# EAGLE board ProtoBlue_Base (EAGLE 9.2.0)
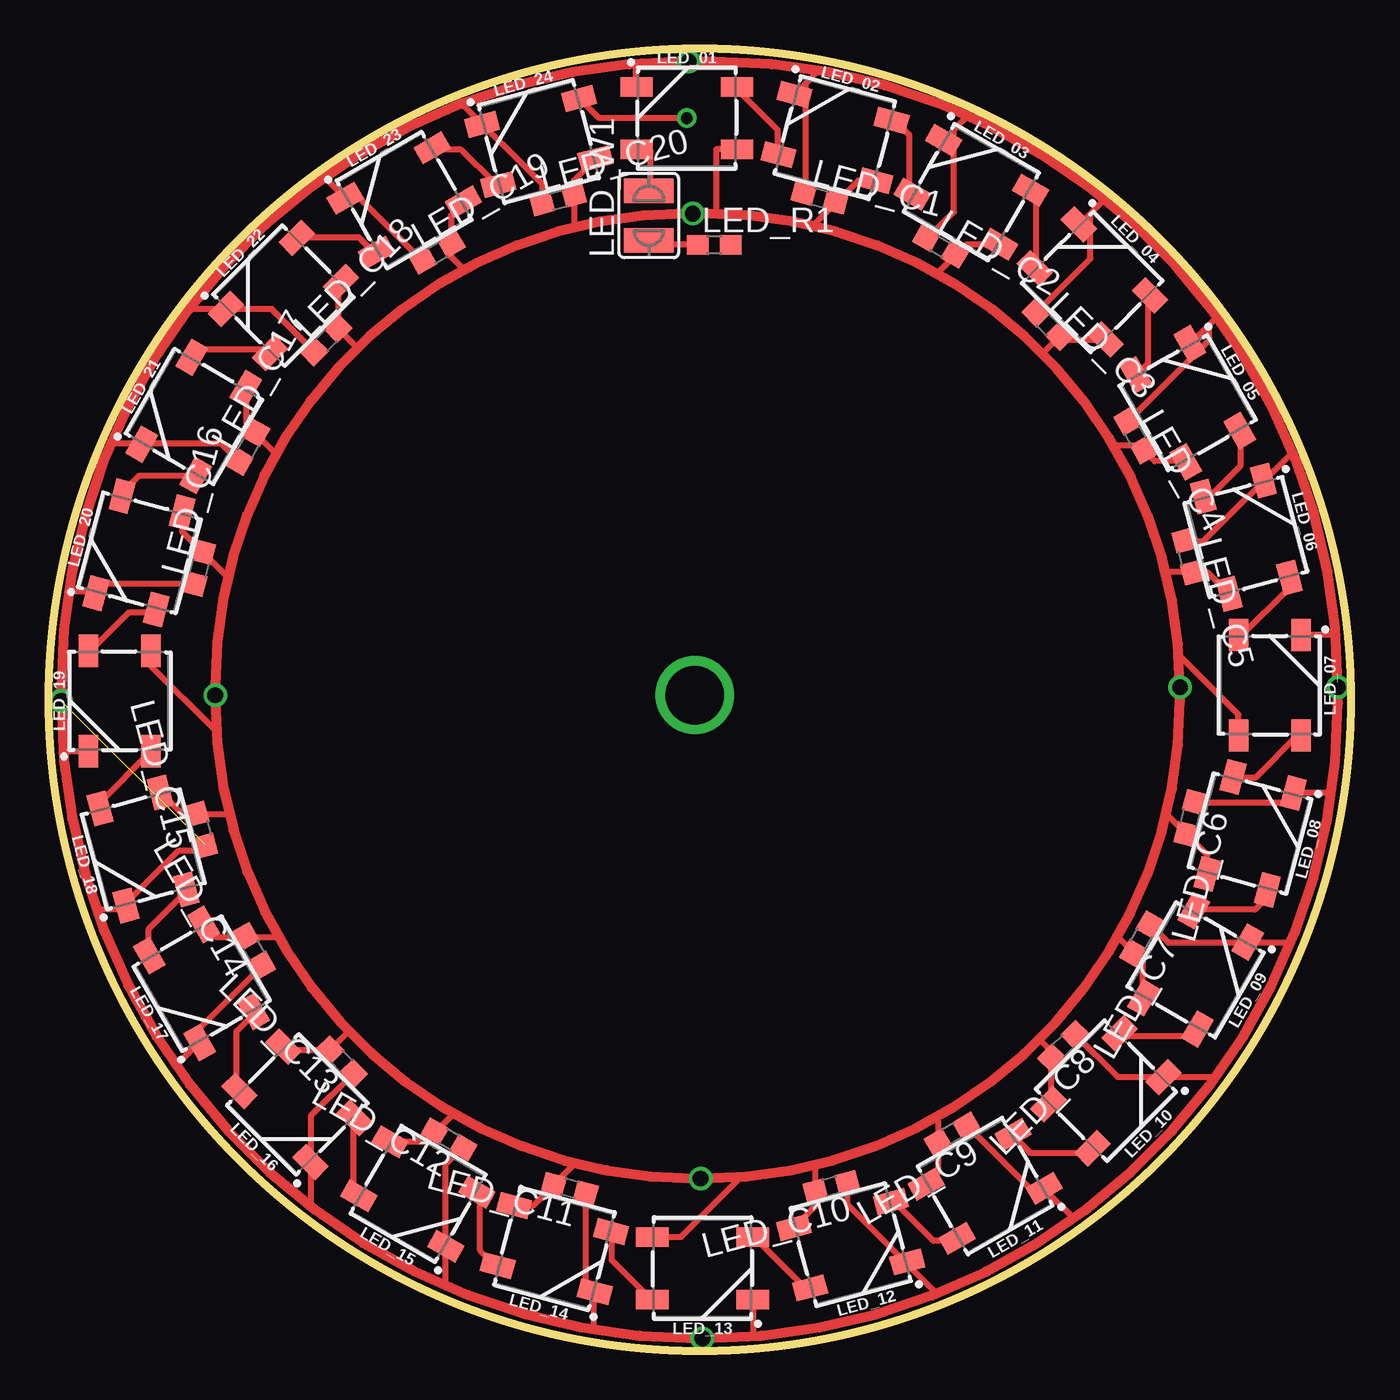
[diagram p0: board, top side]
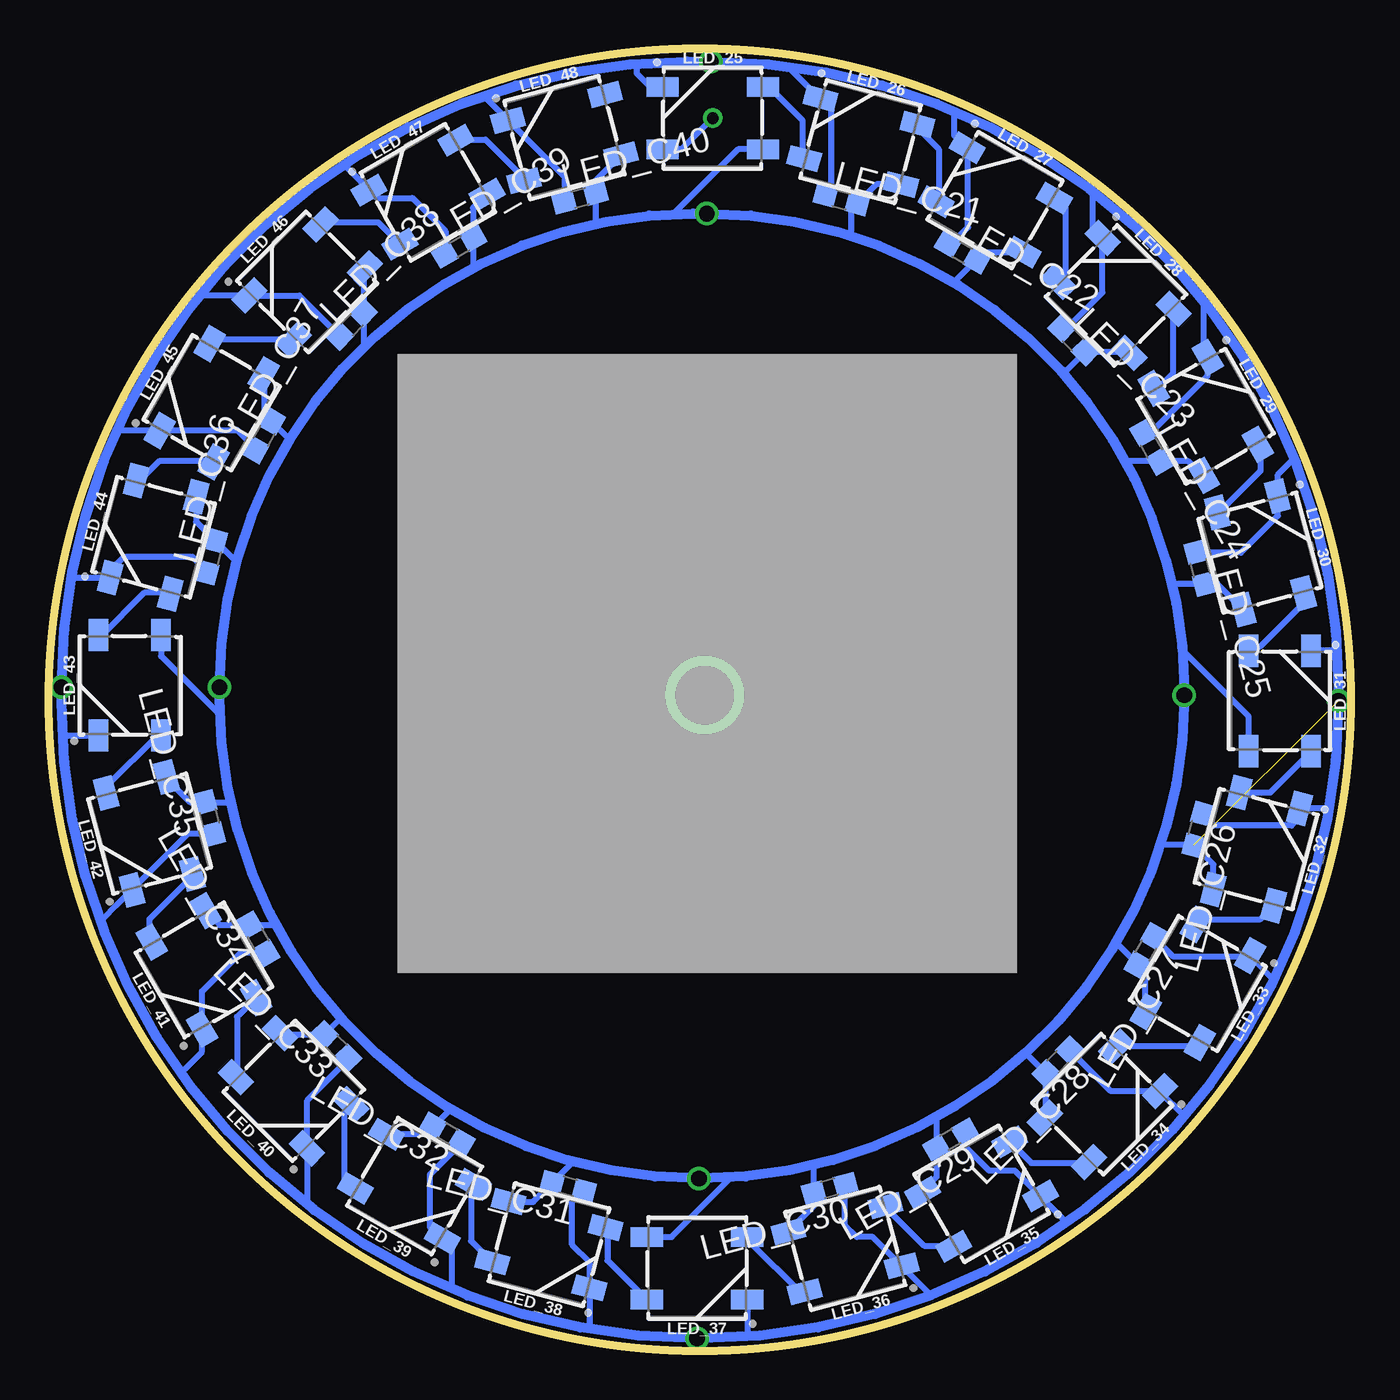
[diagram p1: board, bottom side, seen from below]

Size 66.8 x 66.8 mm. Coordinates in mm from the lower left corner, seen from the top.
Outline: circle at 33.4,33.4 radius 33.4
Copper layers (1*16): Top 0.035mm / dielectric 1.5mm / Bottom 0.035mm
Design rules "default": minimum track width 6mil, minimum drill 0.35mm, track to track 6mil, track to pad 6mil, pad to pad 6mil, via to via 6mil, smd to smd 6mil, copper to edge 40mil, drill to drill 6mil, minimum pad ring 10mil, minimum via ring 8mil, stop-mask expansion 4mil, vias tented up to drill 0mil, thermal gap 10mil

## Footprints (pad centres in the part's own frame; a part is rotated, then mirrored left to right if it is on the bottom)
WS2812B = smd 1.651 x 1: 1 2.577,-1.6; 2 2.577,1.6; 3 -2.577,1.6; 4 -2.577,-1.6
C0603 = smd 1.1 x 1: 1 -0.85,0; 2 0.85,0
SJW = smd 1.27 x 2.54: 1 -1.27,0; 2 1.27,0

## Placement (x,y rotation side)
LED_01  [WS2812B]  32.74,63.24 0 top
LED_02  [WS2812B]  40.34,62.24 345 top
LED_03  [WS2812B]  47.34,59.44 330 top
LED_04  [WS2812B]  53.54,54.84 315 top
LED_05  [WS2812B]  58.44,48.64 300 top
LED_06  [WS2812B]  61.44,41.74 285 top
LED_07  [WS2812B]  62.64,34.14 270 top
LED_08  [WS2812B]  61.64,26.54 255 top
LED_09  [WS2812B]  58.84,19.54 240 top
LED_10  [WS2812B]  54.24,13.34 225 top
LED_11  [WS2812B]  48.04,8.44 210 top
LED_12  [WS2812B]  41.14,5.44 195 top
LED_13  [WS2812B]  33.54,4.24 180 top
LED_14  [WS2812B]  25.94,5.24 165 top
LED_15  [WS2812B]  18.94,8.04 150 top
LED_16  [WS2812B]  12.74,12.64 135 top
LED_17  [WS2812B]  7.84,18.84 120 top
LED_18  [WS2812B]  4.84,25.74 105 top
LED_19  [WS2812B]  3.64,33.34 90 top
LED_20  [WS2812B]  4.64,40.94 75 top
LED_21  [WS2812B]  7.44,47.94 60 top
LED_22  [WS2812B]  12.04,54.14 45 top
LED_23  [WS2812B]  18.24,59.04 30 top
LED_24  [WS2812B]  25.14,62.04 15 top
LED_25  [WS2812B]  32.74,63.24 0 bottom
LED_26  [WS2812B]  25.14,62.04 345 bottom
LED_27  [WS2812B]  18.24,59.04 330 bottom
LED_28  [WS2812B]  12.04,54.14 315 bottom
LED_29  [WS2812B]  7.44,47.94 300 bottom
LED_30  [WS2812B]  4.64,40.94 285 bottom
LED_31  [WS2812B]  3.64,33.34 270 bottom
LED_32  [WS2812B]  4.84,25.74 255 bottom
LED_33  [WS2812B]  7.84,18.84 240 bottom
LED_34  [WS2812B]  12.74,12.64 225 bottom
LED_35  [WS2812B]  18.94,8.04 210 bottom
LED_36  [WS2812B]  25.94,5.24 195 bottom
LED_37  [WS2812B]  33.54,4.24 180 bottom
LED_38  [WS2812B]  41.14,5.44 165 bottom
LED_39  [WS2812B]  48.04,8.44 150 bottom
LED_40  [WS2812B]  54.24,13.34 135 bottom
LED_41  [WS2812B]  58.84,19.54 120 bottom
LED_42  [WS2812B]  61.64,26.54 105 bottom
LED_43  [WS2812B]  62.64,34.14 90 bottom
LED_44  [WS2812B]  61.44,41.74 75 bottom
LED_45  [WS2812B]  58.44,48.64 60 bottom
LED_46  [WS2812B]  53.54,54.84 45 bottom
LED_47  [WS2812B]  47.34,59.44 30 bottom
LED_48  [WS2812B]  40.34,62.24 15 bottom
LED_C1  100pF  [C0603]  39.54,59.14 345 top
LED_C2  100pF  [C0603]  45.74,56.64 330 top
LED_C3  100pF  [C0603]  51.24,52.64 315 top
LED_C4  100pF  [C0603]  55.74,46.94 300 top
LED_C5  100pF  [C0603]  58.44,40.74 285 top
LED_C6  100pF  [C0603]  58.54,27.34 255 top
LED_C7  100pF  [C0603]  56.04,21.14 240 top
LED_C8  100pF  [C0603]  52.04,15.64 225 top
LED_C9  100pF  [C0603]  46.34,11.14 210 top
LED_C10  100pF  [C0603]  40.14,8.44 195 top
LED_C11  100pF  [C0603]  26.74,8.34 165 top
LED_C12  100pF  [C0603]  20.54,10.84 150 top
LED_C13  100pF  [C0603]  15.04,14.84 135 top
LED_C14  100pF  [C0603]  10.54,20.54 120 top
LED_C15  100pF  [C0603]  7.84,26.74 105 top
LED_C16  100pF  [C0603]  7.74,40.14 75 top
LED_C17  100pF  [C0603]  10.24,46.34 60 top
LED_C18  100pF  [C0603]  14.24,51.84 45 top
LED_C19  100pF  [C0603]  19.94,56.34 30 top
LED_C20  100pF  [C0603]  26.14,59.04 15 top
LED_C21  100pF  [C0603]  26.14,59.04 345 bottom
LED_C22  100pF  [C0603]  19.94,56.34 330 bottom
LED_C23  100pF  [C0603]  14.24,51.84 315 bottom
LED_C24  100pF  [C0603]  10.24,46.34 300 bottom
LED_C25  100pF  [C0603]  7.74,40.14 285 bottom
LED_C26  100pF  [C0603]  7.84,26.74 255 bottom
LED_C27  100pF  [C0603]  10.54,20.54 240 bottom
LED_C28  100pF  [C0603]  15.04,14.84 225 bottom
LED_C29  100pF  [C0603]  20.54,10.84 210 bottom
LED_C30  100pF  [C0603]  26.74,8.34 195 bottom
LED_C31  100pF  [C0603]  40.14,8.44 165 bottom
LED_C32  100pF  [C0603]  46.34,11.14 150 bottom
LED_C33  100pF  [C0603]  52.04,15.64 135 bottom
LED_C34  100pF  [C0603]  56.04,21.14 120 bottom
LED_C35  100pF  [C0603]  58.54,27.34 105 bottom
LED_C36  100pF  [C0603]  58.44,40.74 75 bottom
LED_C37  100pF  [C0603]  55.74,46.94 60 bottom
LED_C38  100pF  [C0603]  51.24,52.64 45 bottom
LED_C39  100pF  [C0603]  45.74,56.64 30 bottom
LED_C40  100pF  [C0603]  39.54,59.14 15 bottom
LED_R1  100K  [C0603]  34.14,56.74 0 top
LED_W1  [SJW]  30.79,58.24 90 top

## Library data of the parts
LED_01-LED_09 LED_10-LED_48 = SparkFun-LED
LED_C1-LED_C40 LED_R1 = eagle-ltspice
LED_W1 = jumper

## Tracks (layer width: path | path; a pad name or v marks a point on that pad's centre or on a via)
LED01_D+
  Top 0.305: 35.14,64.89 37.39,62.64 37.39,61.39
LED01_VDD
  Top 0.305: 35.34,61.64 34.24,61.64 34.24,58.34
LED01_VSS
  Top 0.305: 30.14,64.84 30.14,66.04
LED02_D+
  Top 0.305: 43.39,63.14 44.14,62.39 44.14,59.39
LED02_VDD
  Top 0.305: 42.44,60.04 41.54,60.04 39.24,57.74
LED02_VSS
  Top 0.305: 38.24,64.44 38.84,65.04 | 38.84,65.04 39.54,65.74 | 38.74,59.34 38.84,59.44 38.84,65.04
LED03_D+
  Top 0.305: 50.39,59.39 50.64,59.14 50.64,55.64
LED03_VDD
  Top 0.305: 48.74,56.74 47.04,56.74 45.54,55.24
LED03_VSS
  Top 0.305: 45.94,62.14 46.44,62.64 | 46.44,62.64 47.14,63.34 | 45.04,57.04 46.44,58.44 46.44,62.64
LED04_D+
  Top 0.305: 56.39,54.14 56.39,50.64 55.89,50.14
LED04_VDD
  Top 0.305: 54.24,51.84 52.04,51.84 51.84,52.04 50.94,51.14
LED04_VSS
  Top 0.305: 52.84,57.74 53.44,58.34 | 53.44,58.34 54.14,59.04 | 50.64,53.24 53.44,56.04 53.44,58.34
LED05_D+
  Top 0.305: 61.14,47.14 61.14,45.39 59.39,43.64
LED05_VDD
  Top 0.305: 58.34,45.64 56.74,45.64 56.44,45.94 56.24,46.14 55.94,46.44 54.64,46.44
LED05_VSS
  Top 0.305: 58.54,51.64 59.54,52.64 | 59.54,52.64 59.94,53.04 | 55.34,47.64 59.54,51.84 59.54,52.64
LED06_D+
  Top 0.305: 63.64,39.64 63.64,39.14 61.14,36.64
LED06_VDD
  Top 0.305: 60.54,38.84 59.44,39.94 57.24,39.94
LED06_VSS
  Top 0.305: 58.24,41.54 59.24,41.54 63.74,46.04
LED07_D+
  Top 0.305: 64.14,31.64 61.89,29.39 60.89,29.39
LED07_VDD
  Top 0.305: 61.04,31.54 61.04,32.64 57.94,35.74
LED07_VSS
  Top 0.305: 64.24,36.74 66.04,36.74
LED08_D+
  Top 0.305: 62.64,23.39 61.89,22.64 58.89,22.64
LED08_VDD
  Top 0.305: 59.44,24.44 59.44,25.44 57.34,27.54
LED08_VSS
  Top 0.305: 58.74,28.14 63.34,28.14 63.84,28.64 65.84,28.64
LED09_D+
  Top 0.305: 58.89,16.39 58.64,16.14 54.89,16.14
LED09_VDD
  Top 0.305: 56.14,18.04 56.14,19.94 54.84,21.24
LED09_VSS
  Top 0.305: 56.54,21.84 57.44,20.94 63.74,20.94
LED10_D+
  Top 0.305: 53.39,10.14 50.39,10.14 49.39,11.14
LED10_VDD
  Top 0.305: 51.34,12.64 51.44,12.74 51.44,15.34 50.84,15.94
LED10_VSS
  Top 0.305: 52.64,16.24 54.84,14.04 59.84,14.04
LED11_D+
  Top 0.305: 46.64,5.64 45.39,5.64 43.39,7.64
LED11_VDD
  Top 0.305: 45.04,8.54 45.64,9.14 45.64,12.04
LED11_VSS
  Top 0.305: 47.14,11.54 50.34,8.34 51.04,8.34 52.64,6.74
LED12_D+
  Top 0.305: 38.89,3.14 36.14,5.89
LED12_VDD
  Top 0.305: 38.24,6.34 39.34,7.44 39.34,9.54
LED12_VSS
  Top 0.305: 40.94,8.64 40.94,7.54 45.54,2.94
LED13_D+
  Top 0.305: 30.89,2.64 28.89,4.64 28.89,6.14
LED13_VDD
  Top 0.305: 30.94,5.84 32.44,5.84 35.54,8.94
LED13_VSS
  Top 0.305: 36.14,2.64 36.14,0.74
LED14_D+
  Top 0.305: 22.89,4.39 22.14,5.14 22.14,8.14
LED14_VDD
  Top 0.305: 23.84,7.44 24.84,7.44 27.04,9.64
LED14_VSS
  Top 0.305: 27.54,8.14 27.54,3.44 27.94,3.04 27.94,1.04
LED15_D+
  Top 0.305: 15.89,7.89 15.64,8.14 15.64,11.89
LED15_VDD
  Top 0.305: 17.54,10.74 19.34,10.74 20.84,12.24
LED15_VSS
  Top 0.305: 21.24,10.44 20.34,9.54 20.34,3.34
LED16_D+
  Top 0.305: 9.64,13.39 9.64,16.39 10.64,17.39
LED16_VDD
  Top 0.305: 12.04,15.54 12.14,15.44 14.44,15.44 15.44,16.44
LED16_VSS
  Top 0.305: 15.64,14.24 13.44,12.04 13.44,7.34
LED17_D+
  Top 0.305: 5.14,20.14 5.14,21.64 7.14,23.64
LED17_VDD
  Top 0.305: 7.94,21.84 8.54,21.24 11.74,21.24
LED17_VSS
  Top 0.305: 10.94,19.74 7.74,16.54 7.74,15.84 6.54,14.64 6.54,14.54
LED18_D+
  Top 0.305: 2.64,27.89 2.64,28.14 5.14,30.64
LED18_VDD
  Top 0.305: 5.74,28.64 6.84,27.54 9.24,27.54
LED18_VSS
  Top 0.305: 8.14,25.64 6.64,25.64 3.64,22.64 2.64,22.64
LED19_D+
  Top 0.305: 2.14,35.89 4.14,37.89 5.39,37.89
LED19_VDD
  Top 0.305: 5.24,35.94 5.24,35.14 8.54,31.84
LED19_VSS
  Top 0.305: 2.04,30.74 0.74,30.74
LED20_D+
  Top 0.305: 3.64,43.89 4.64,44.89 7.39,44.89
LED20_VDD
  Top 0.305: 6.84,43.04 6.84,42.04 9.24,39.64
LED20_VSS
  Top 0.305: 7.54,39.34 2.84,39.34 2.44,38.94 0.94,38.94
LED21_D+
  Top 0.305: 7.39,50.89 7.89,51.39 11.39,51.39
LED21_VDD
  Top 0.305: 10.14,49.34 10.14,47.54 11.64,46.04
LED21_VSS
  Top 0.305: 9.84,45.54 8.84,46.54 3.14,46.54
LED22_D+
  Top 0.305: 12.64,57.14 15.89,57.14 16.64,56.39
LED22_VDD
  Top 0.305: 15.04,54.84 14.84,54.64 14.84,52.44 15.84,51.44
LED22_VSS
  Top 0.305: 13.64,51.24 11.44,53.44 7.24,53.44
LED23_D+
  Top 0.305: 19.64,61.64 21.14,61.64 22.89,59.89
LED23_VDD
  Top 0.305: 21.34,58.94 20.64,58.24 20.64,56.14 21.34,55.44
LED23_VSS
  Top 0.305: 19.24,55.84 15.94,59.14 15.24,59.14 14.14,60.24
LED24_D+  (via drill 0.6)
  Top 0.305: v32.74,63.24 28.24,63.24 27.24,64.24
  Bottom 0.305: v32.74,63.24 34.34,61.64 35.34,61.64
LED24_VDD
  Top 0.305: 28.04,61.14 26.94,60.04 26.94,57.64
LED24_VSS
  Top 0.305: 25.34,58.84 25.34,59.84 21.14,64.04
LED25_D+
  Bottom 0.305: 29.64,64.64 28.14,63.14 28.14,61.14
LED25_VDD
  Bottom 0.305: 30.14,61.64 31.44,61.64 34.74,58.34
LED25_VSS
  Bottom 0.305: 36.64,66.04 36.64,65.54 35.94,64.84
LED26_D+
  Bottom 0.305: 22.14,62.64 21.14,61.64 21.14,58.64
LED26_VDD
  Bottom 0.305: 23.04,59.84 24.34,59.84 25.64,58.54 25.64,57.24
LED26_VSS
  Bottom 0.305: 28.84,65.84 27.39,64.39 27.24,64.24 26.64,63.64 26.64,59.39
LED27_D+
  Bottom 0.305: 15.14,59.14 14.64,58.64 14.64,54.64
LED27_VDD
  Bottom 0.305: 16.84,56.34 18.84,56.34 20.34,54.84
LED27_VSS
  Bottom 0.305: 20.39,56.89 19.64,57.64 19.64,61.89 19.89,61.89 | 19.74,61.74 19.89,61.89 | 20.34,63.54 20.34,62.34 20.14,62.14 19.89,61.89
LED28_D+
  Bottom 0.305: 9.14,53.64 9.14,50.14 10.14,49.14
LED28_VDD
  Bottom 0.305: 11.34,51.14 11.44,51.24 13.64,51.24 14.74,50.14
LED28_VSS
  Bottom 0.305: 13.24,59.44 13.24,58.04 13.24,57.54 12.74,57.04 12.74,54.29 14.64,52.39
LED29_D+
  Bottom 0.305: 4.64,46.14 4.64,45.14 6.64,43.14
LED29_VDD
  Bottom 0.305: 7.54,44.84 8.34,45.64 11.54,45.64
LED29_VSS
  Bottom 0.305: 7.54,53.74 7.54,52.34 7.54,51.14 7.34,50.94 7.34,50.04 10.34,47.04
LED30_D+
  Bottom 0.305: 5.14,36.14 4.64,36.14 2.14,38.64
LED30_VDD
  Bottom 0.305: 5.54,38.04 6.84,39.34 9.14,39.34
LED30_VSS
  Bottom 0.305: 2.94,45.74 3.74,44.94 3.74,42.84 5.64,40.94 7.94,40.94
LED31_D+
  Bottom 0.305: 5.64,28.64 4.14,28.64 2.14,30.64
LED31_VDD
  Bottom 0.305: 5.24,30.74 5.24,32.54 8.54,35.84
LED31_VSS
  Bottom 0.305: 2.04,35.94 0.74,35.94
LED32_D+
  Bottom 0.305: 7.64,22.14 4.64,22.14 4.14,22.64
LED32_VDD  (via drill 0.8)  (1 unrouted)
  Top 0.508: 32.74,66.14 arc90 0.64,34.04 v0.64,33.34 arc90 33.34,0.64 v33.54,0.64 arc90 66.14,33.24 v66.14,34.04 66.14,34.14 arc90 34.14,66.14 v32.84,66.14 32.74,66.14
  Bottom 0.305: 7.04,23.64 7.04,24.94 8.04,25.94 9.74,25.94
  Bottom 0.508: v32.84,66.14 arc90 0.64,33.94 v0.64,33.34 arc90 33.34,0.64 v33.54,0.64 arc90 66.14,33.24 v66.14,34.04 arc90 34.04,66.14 v32.84,66.14
LED32_VSS
  Bottom 0.305: 1.04,27.84 2.14,27.84 3.04,26.94 7.04,26.94 7.64,27.54
LED33_D+
  Bottom 0.305: 11.89,15.89 11.64,15.64 7.89,15.64
LED33_VDD
  Bottom 0.305: 10.54,17.34 10.54,19.44 12.04,20.94
LED33_VSS
  Bottom 0.305: 3.94,19.04 5.14,20.24 9.14,20.24 10.14,21.24
LED34_D+
  Bottom 0.305: 17.39,10.64 16.39,9.64 13.39,9.64
LED34_VDD
  Bottom 0.305: 15.74,11.94 15.64,12.04 15.64,14.24 16.64,15.24
LED34_VSS
  Bottom 0.305: 8.54,12.04 9.84,13.34 12.34,13.34 14.44,15.44
LED35_D+
  Bottom 0.305: 23.89,7.39 21.89,5.39 20.39,5.39
LED35_VDD
  Bottom 0.305: 22.04,8.14 21.24,8.94 21.24,11.94
LED35_VSS
  Bottom 0.305: 14.64,6.64 17.24,9.24 18.54,9.24 19.84,10.54 19.84,11.24
LED36_D+
  Bottom 0.305: 30.89,5.89 30.89,5.64 28.14,2.89
LED36_VDD
  Bottom 0.305: 28.84,6.14 27.54,7.44 27.54,9.54
LED36_VSS
  Bottom 0.305: 21.54,2.84 24.54,5.84 25.34,5.84 25.94,6.44 25.94,8.54
LED37_D+
  Bottom 0.305: 38.14,6.39 38.14,4.64 36.14,2.64
LED37_VDD
  Bottom 0.305: 36.14,5.84 34.84,5.84 31.84,8.84
LED37_VSS
  Bottom 0.305: 30.94,2.64 30.94,0.74
LED38_D+
  Bottom 0.305: 45.14,8.64 45.14,5.64 44.14,4.64
LED38_VDD
  Bottom 0.305: 43.24,7.64 41.94,7.64 39.94,9.64
LED38_VSS
  Bottom 0.305: 39.04,1.14 39.04,4.54 39.94,5.44 39.94,7.64 39.34,8.24
LED39_D+
  Bottom 0.305: 51.14,12.64 51.64,12.14 51.64,8.39
LED39_VDD
  Bottom 0.305: 49.44,11.14 47.44,11.14 46.14,12.44
LED39_VSS
  Bottom 0.305: 46.14,3.24 46.14,5.24 47.24,6.34 47.24,9.04 45.64,10.64
LED40_D+
  Bottom 0.305: 56.14,18.14 57.14,17.14 57.14,13.89
LED40_VDD
  Bottom 0.305: 54.94,16.24 52.64,16.24 51.84,17.04
LED40_VSS
  Bottom 0.305: 53.54,7.64 53.54,8.94 53.54,10.34 53.54,12.84 51.44,14.94
LED41_D+
  Bottom 0.305: 59.39,24.39 61.64,22.14 61.64,20.89
LED41_VDD
  Bottom 0.305: 58.74,22.54 58.04,21.84 55.14,21.84
LED41_VSS
  Bottom 0.305: 59.94,14.34 58.94,15.34 58.94,18.44 56.94,20.44 55.64,20.44
LED42_D+
  Bottom 0.305: 61.14,31.64 63.89,28.89 63.89,28.64
LED42_VDD
  Bottom 0.305: 60.84,29.44 59.54,28.14 57.44,28.14
LED42_VSS
  Bottom 0.305: 64.04,22.14 63.34,22.84 62.54,23.64 59.64,26.54 58.34,26.54
LED43_D+
  Bottom 0.305: 60.64,38.89 61.89,38.89 64.14,36.64
LED43_VDD
  Bottom 0.305: 61.04,36.74 61.04,35.64 58.04,32.64
LED43_VSS
  Bottom 0.305: 64.24,31.54 66.04,31.54
LED44_D+
  Bottom 0.305: 58.39,45.64 61.14,45.64 62.14,44.64
LED44_VDD
  Bottom 0.305: 59.24,43.84 59.24,42.54 57.14,40.44
LED44_VSS
  Bottom 0.305: 65.64,39.64 64.04,39.64 62.94,40.74 59.44,40.74 58.64,39.94
LED45_D+
  Bottom 0.305: 58.64,51.64 58.39,51.89 54.14,51.89
LED45_VDD
  Bottom 0.305: 55.74,50.04 55.74,48.04 54.44,46.74
LED45_VSS
  Bottom 0.305: 63.24,47.24 57.14,47.24 56.14,46.24
LED46_D+
  Bottom 0.305: 52.89,57.89 49.89,57.89 48.89,56.89
LED46_VDD
  Bottom 0.305: 50.54,55.54 50.64,55.44 50.64,51.54
LED46_VSS
  Bottom 0.305: 58.94,54.14 56.84,54.14 56.54,54.14 53.94,54.14 51.84,52.04
LED47_D+
  Bottom 0.305: 45.89,62.14 44.39,62.14 42.39,60.14
LED47_VDD
  Bottom 0.305: 44.34,59.34 45.04,58.64 45.04,55.54
LED47_VSS
  Bottom 0.305: 51.64,60.84 49.94,59.14 48.14,59.14 46.44,57.44 46.44,56.24
LED48_VDD
  Bottom 0.305: 37.44,61.34 38.74,60.04 38.74,57.84
LED48_VSS
  Bottom 0.305: 44.44,64.34 43.64,63.54 43.24,63.14 40.34,60.24 40.34,58.84
LED_D+
  Top 0.305: 30.14,61.64 30.84,61.64 30.84,59.34
LED_R1_OUT
  Top 0.305: 33.34,56.74 31.14,56.74 30.84,57.04
MOUNT01  (via drill 3)
  other vias: 33.14,33.64
PPBUS_VDD  (via drill 0.8)
  Top 0.508: 32.74,58.34 arc90 8.54,34.14 v8.54,33.64 8.54,33.44 arc90 33.14,8.84 v33.44,8.84 33.54,8.84 arc90 58.04,33.34 v58.04,34.04 arc90 33.74,58.34 v33.04,58.34 32.74,58.34 | 32.74,58.34 32.64,58.34
  Bottom 0.508: v33.04,58.34 arc90 8.54,33.84 v8.54,33.64 arc90 33.34,8.84 v33.44,8.84 arc90 58.04,33.44 v58.04,34.04 arc90 33.74,58.34 v33.04,58.34